# EAGLE board Sequencer-Memory-V1.0-3 2 (EAGLE 7.6.0)

Size 113.97 x 152.38 mm. Coordinates in mm from the lower left corner, seen from the top.
Outline: 113.97,0 113.97,152.38 0,152.38 0,0 113.97,0
Copper layers (1*16): Top 0.0356mm / dielectric 1.5011mm / Bottom 0.0356mm
Design rules "LaenPCBOrder *": minimum track width 6mil, minimum drill 13mil, track to track 6mil, track to pad 6mil, pad to pad 6mil, via to via 6mil, smd to smd 6mil, copper to edge 15mil, drill to drill 6mil, minimum pad ring 7mil, minimum via ring 7mil, stop-mask expansion 3mil, vias tented up to drill 0mil, thermal gap 10mil
Holes 3.2 mm at 111.43,2.54 111.43,149.86 2.21,149.86 2.21,2.54

## Footprints (pad centres in the part's own frame; a part is rotated, then mirrored left to right if it is on the bottom)
C025-024X044 = drill 0.813 pad 1.422 octagon: 1 -1.27,0; 2 1.27,0
SW4-6.2X6.2X5.0MM = drill 1.143 pad 1.905 square: 1 -3.25,2.25 | drill 1.143 pad 1.905: 2 -3.25,-2.25; 3 3.25,-2.25; 4 3.25,2.25
JP1 = drill 0.914 long: 1 0,-1.27; 2 0,1.27
LED5MM = drill 0.813 octagon: A -1.27,0; K 1.27,0
DIL28-6 = drill 0.813 long: 1 -16.51,-7.62; 2 -13.97,-7.62; 3 -11.43,-7.62; 4 -8.89,-7.62; 5 -6.35,-7.62; 6 -3.81,-7.62; 7 -1.27,-7.62; 8 1.27,-7.62; 9 3.81,-7.62; 10 6.35,-7.62; 11 8.89,-7.62; 12 11.43,-7.62; 13 13.97,-7.62; 14 16.51,-7.62; 15 16.51,7.62; 16 13.97,7.62; 17 11.43,7.62; 18 8.89,7.62; 19 6.35,7.62; 20 3.81,7.62; 21 1.27,7.62; 22 -1.27,7.62; 23 -3.81,7.62; 24 -6.35,7.62; 25 -8.89,7.62; 26 -11.43,7.62; 27 -13.97,7.62; 28 -16.51,7.62
DIL28-3 = drill 0.813 long: 1 -16.51,-3.81; 2 -13.97,-3.81; 3 -11.43,-3.81; 4 -8.89,-3.81; 5 -6.35,-3.81; 6 -3.81,-3.81; 7 -1.27,-3.81; 8 1.27,-3.81; 9 3.81,-3.81; 10 6.35,-3.81; 11 8.89,-3.81; 12 11.43,-3.81; 13 13.97,-3.81; 14 16.51,-3.81; 15 16.51,3.81; 16 13.97,3.81; 17 11.43,3.81; 18 8.89,3.81; 19 6.35,3.81; 20 3.81,3.81; 21 1.27,3.81; 22 -1.27,3.81; 23 -3.81,3.81; 24 -6.35,3.81; 25 -8.89,3.81; 26 -11.43,3.81; 27 -13.97,3.81; 28 -16.51,3.81
DIL8 = drill 0.813 long: 1 -3.81,-3.81; 2 -1.27,-3.81; 3 1.27,-3.81; 4 3.81,-3.81; 5 3.81,3.81; 6 1.27,3.81; 7 -1.27,3.81; 8 -3.81,3.81
FTDI_DEVICE_SIDE = drill 1 square: P$1 -6.35,0 | drill 1.016 pad 1.778: P$2 -3.81,0; P$3 -1.27,0; P$4 1.27,0; P$5 3.81,0; P$6 6.35,0
1X03 = drill 1.016 long: 1 -2.54,0; 2 0,0; 3 2.54,0
TACTILE-PTH-SIDEEZ = drill 0.8 pad 1.7: 1 -2.5,0; 2 2.5,0 | drill 1.2 pad 2.2: ANCHOR1 -3.5,2.5; ANCHOR2 3.5,2.5
HC49/S = drill 0.813: 1 -2.413,0; 2 2.413,0
0207/10 = drill 0.813 octagon: 1 -5.08,0; 2 5.08,0
9070-1W = drill 0.813 long: 1 5.08,-2.54; 2 5.08,0; 3 5.08,2.54 | drill 1.118 pad 1.778: B 0,-2.54; B1 0,2.54
MA20-2 = drill 1.016 octagon: 1 -24.13,-1.27; 2 -24.13,1.27; 3 -21.59,-1.27; 4 -21.59,1.27; 5 -19.05,-1.27; 6 -19.05,1.27; 7 -16.51,-1.27; 8 -16.51,1.27; 9 -13.97,-1.27; 10 -13.97,1.27; 11 -11.43,-1.27; 12 -11.43,1.27; 13 -8.89,-1.27; 14 -8.89,1.27; 15 -6.35,-1.27; 16 -6.35,1.27; 17 -3.81,-1.27; 18 -3.81,1.27; 19 -1.27,-1.27; 20 -1.27,1.27; 21 1.27,-1.27; 22 1.27,1.27; 23 3.81,-1.27; 24 3.81,1.27; 25 6.35,-1.27; 26 6.35,1.27; 27 8.89,-1.27; 28 8.89,1.27; 29 11.43,-1.27; 30 11.43,1.27; 31 13.97,-1.27; 32 13.97,1.27; 33 16.51,-1.27; 34 16.51,1.27; 35 19.05,-1.27; 36 19.05,1.27; 37 21.59,-1.27; 38 21.59,1.27; 39 24.13,-1.27; 40 24.13,1.27

## Placement (x,y rotation side)
C11  20pf  [C025-024X044]  47.93,127 270 top
C12  20pf  [C025-024X044]  47.93,119.38 90 top
C13  0.1  [C025-024X044]  74.6,133.35 180 top
C14  0.1  [C025-024X044]  18.72,113.03 0 top
C15  0.1  [C025-024X044]  18.72,105.41 0 top
C16  0.1  [C025-024X044]  94.92,1.27 180 top
C17  0.1  [C025-024X044]  94.92,39.37 180 top
C18  0.1  [C025-024X044]  44.12,39.37 180 top
C19  0.1  [C025-024X044]  69.52,39.37 180 top
C20  0.1  [C025-024X044]  44.12,1.27 180 top
C21  0.1  [C025-024X044]  18.72,1.27 180 top
C22  0.1  [C025-024X044]  69.52,1.27 180 top
C23  0.1  [C025-024X044]  18.72,39.37 180 top
CPU-RESET  TS-1109-7  [SW4-6.2X6.2X5.0MM]  39.04,96.52 0 top
DTR-RESET  [JP1]  74.6,140.97 270 top
FTDI-VCC  [JP1]  84.76,140.97 270 top
HEART  [LED5MM]  61.9,148.59 270 top
IC1  [DIL28-6]  94.92,58.42 90 top
IC1-5  MCP23017SP  [DIL28-3]  107.62,110.49 90 top
IC2  [DIL28-6]  94.92,20.32 90 top
IC3  [DIL28-6]  69.52,58.42 90 top
IC4  [DIL28-6]  69.52,20.32 90 top
IC5  [DIL28-6]  18.72,58.42 90 top
IC6  [DIL28-6]  44.12,58.42 90 top
IC7  [DIL28-6]  44.12,20.32 90 top
IC8  [DIL28-6]  18.72,20.32 90 top
IC9  24AA01P  [DIL8]  16.18,96.52 0 top
IC10  ATMEGA328P_PDIP  [DIL28-3]  19.99,123.19 0 top
IC11  MCP23017SP  [DIL28-3]  82.22,110.49 90 top
IC12  MCP23017SP  [DIL28-3]  94.92,110.49 90 top
IC13  MCP23017SP  [DIL28-3]  69.52,110.49 90 top
IC14  MCP23017SP  [DIL28-3]  56.82,110.49 90 top
JP3  FTDI_DEVICE  [FTDI_DEVICE_SIDE]  80.95,147.32 0 top
JP4  [1X03]  7.29,96.52 90 top
LOAD-UC  SWITCH-MOMENTARY-2SIDE_EZ  [TACTILE-PTH-SIDEEZ]  23.8,149.86 180 top
LOADING  [LED5MM]  41.58,148.59 270 top
PWR1  [LED5MM]  105.08,148.59 270 top
Q1  16Mhz  [HC49/S]  41.58,123.19 90 top
R1  330  [0207/10]  105.08,137.16 270 top
R3  10k  [0207/10]  7.29,19.05 90 top
R5  2.2k  [0207/10]  8.56,109.22 0 top
R6  330  [0207/10]  61.9,137.16 270 top
R8  10k  [0207/10]  8.56,113.03 0 top
R11  330  [0207/10]  51.74,137.16 270 top
R12  2.2k  [0207/10]  8.56,105.41 0 top
R16  330  [0207/10]  41.58,137.16 270 top
R25  10k  [0207/10]  39.04,105.41 0 top
READY  [LED5MM]  51.74,148.59 270 top
S-A  [9070-1W]  11.1,146.05 270 top
SV1  [MA20-2]  27.61,82.55 0 top
SV2  [MA20-2]  86.03,82.55 180 top

## Library data of the parts
C11-C23 = adafruit
CPU-RESET = Seeed-OPL-Switch; MPN: TS-1109-7
DTR-RESET FTDI-VCC = jumper
HEART LOADING PWR1 READY = led
IC1-IC8 = memory-hitachi; OC_FARNELL: 283605; OC_NEWARK: unknown
IC1-5 IC11-IC14 = microchip; MF: MICROCHIP; MPN: MCP23017-E/SP; OC_FARNELL: 1332088; OC_NEWARK: 31K2959
IC9 = microchip; MPN: 24AA01-I/P; OC_FARNELL: 1331266; OC_NEWARK: 35M0692
IC10 = SparkFun-DigitalIC
JP3 = SparkFun-Connectors
JP4 = pinhead
LOAD-UC = SparkFun-Electromechanical
Q1 = crystal; OC_FARNELL: 1667008; OC_NEWARK: unknown
R1 = eagle-ltspice; SPICEMODEL: NONE; SPICEPREFIX: R
R3 R5 R6 R8 R11 R12 R16 R25 = resistor
S-A = switch
SV1 SV2 = con-lstb; OC_FARNELL: unknown; OC_NEWARK: unknown

## Nets
-CMEMRD: IC1.22 IC2.22 IC3.22 IC4.22 IC5.22 IC6.22 IC7.22 IC8.22 IC10.15
-CMEMSEL: IC1.20 IC2.20 IC3.20 IC4.20 IC5.20 IC6.20 IC7.20 IC8.20 IC10.16
-CMEMWR: IC1.27 IC2.27 IC3.27 IC4.27 IC5.27 IC6.27 IC7.27 IC8.27 IC10.14
-RESET: C13.2 CPU-RESET.3 IC1-5.18 IC10.1 IC11.18 IC12.18 IC13.18 IC14.18 R8.2
AC-LD: IC3.17 IC12.3 SV2.15
AC-LD-INV: IC3.18 IC12.2 SV2.13
AC-RD: IC3.16 IC12.4 SV2.17
ADDR-REG-ID0: IC5.12 IC14.22 SV1.5
ADDR-REG-ID1: IC5.13 IC14.23 SV1.7
ADDR-REG-LD: IC5.15 IC14.24 SV1.9
ADDR-REG-RD: IC5.16 IC14.25 SV1.11
ALU0: IC4.13 IC12.26 SV2.5
ALU1: IC4.12 IC12.27 SV2.7
ALU2: IC4.11 IC12.28 SV2.9
ALU3: IC3.19 IC12.1 SV2.11
ALU-FUNC: IC4.15 IC12.25 SV2.3
ARD-RXIN: IC10.2 JP3.P$3
ARD-TXOUT: IC10.3 JP3.P$2
BR-COND: IC3.13 IC12.6 SV2.4
CADDR0: IC1-5.21 IC1.10 IC2.10 IC3.10 IC4.10 IC5.10 IC6.10 IC7.10 IC8.10
CADDR1: IC1-5.22 IC1.9 IC2.9 IC3.9 IC4.9 IC5.9 IC6.9 IC7.9 IC8.9
CADDR2: IC1-5.23 IC1.8 IC2.8 IC3.8 IC4.8 IC5.8 IC6.8 IC7.8 IC8.8
CADDR3: IC1-5.24 IC1.7 IC2.7 IC3.7 IC4.7 IC5.7 IC6.7 IC7.7 IC8.7
CADDR4: IC1-5.25 IC1.6 IC2.6 IC3.6 IC4.6 IC5.6 IC6.6 IC7.6 IC8.6
CADDR5: IC1-5.26 IC1.5 IC2.5 IC3.5 IC4.5 IC5.5 IC6.5 IC7.5 IC8.5
CADDR6: IC1-5.27 IC1.4 IC2.4 IC3.4 IC4.4 IC5.4 IC6.4 IC7.4 IC8.4
CADDR7: IC1-5.28 IC1.3 IC2.3 IC3.3 IC4.3 IC5.3 IC6.3 IC7.3 IC8.3
CADDR8: IC1-5.1 IC1.25 IC2.25 IC3.25 IC4.25 IC5.25 IC6.25 IC7.25 IC8.25
CADDR9: IC1-5.2 IC1.24 IC2.24 IC3.24 IC4.24 IC5.24 IC6.24 IC7.24 IC8.24
CADDR10: IC1-5.3 IC1.21 IC2.21 IC3.21 IC4.21 IC5.21 IC6.21 IC7.21 IC8.21
CADDR11: IC1-5.4 IC1.23 IC2.23 IC3.23 IC4.23 IC5.23 IC6.23 IC7.23 IC8.23
CADDR12: IC1-5.5 IC1.2 IC2.2 IC3.2 IC4.2 IC5.2 IC6.2 IC7.2 IC8.2
CMEMSEL: IC1.26 IC2.26 IC3.26 IC4.26 IC5.26 IC6.26 IC7.26 IC8.26 R3.1
GND: C11.1 C12.1 C14.1 C15.1 C16.1 C17.1 C18.1 C19.1 C20.1 C21.1 C22.1 C23.1 CPU-RESET.1 IC1-5.10 IC1-5.15 IC1-5.16 IC1-5.17 IC1.14 IC2.14 IC3.14 IC4.14 IC5.14 IC6.14 IC7.14 IC8.14 IC9.4 IC10.8 IC10.22 IC11.10 IC11.15 IC11.16 IC12.10 IC12.17 IC13.10 IC13.15 IC13.17 IC14.10 IC14.16 IC14.17 JP3.P$5 JP3.P$6 JP4.1 LOAD-UC.2 PWR1.K R6.2 R11.2 R16.2 S-A.3 SV1.39 SV1.40 SV2.39 SV2.40
H/L-SWAP: IC3.12 IC12.7 SV2.6
HEART: HEART.A IC10.17
I/D-REG-DN: IC6.13 IC13.3 SV1.8
I/D-REG-LD: IC6.11 IC13.1 SV1.4
I/D-REG-RD: IC6.12 IC13.2 SV1.6
I/D-REG-UP: IC6.15 IC13.4 SV1.10
I/O-ADDR: IC7.17 IC13.26 SV2.31
I/O-RD: IC7.16 IC13.25 SV2.29
I/O-WR: IC7.15 IC13.24 SV2.27
IN: IC3.11 IC12.8 SV2.8
INT: IC7.18 IC13.27 SV2.33
INTA: IC7.19 IC13.28 SV2.35
LD: IC10.19 LOADING.A
MEM-RD: IC7.13 IC13.23 SV2.25
MEM-WR: IC7.12 IC13.22 SV2.23
N$1: PWR1.A R1.1
N$6: C11.2 IC10.9 Q1.2
N$7: C12.2 IC10.10 Q1.1
N$8: C13.1 DTR-RESET.2
N$17: C14.2 IC10.21
N$25: R11.1 READY.K
N$26: LOADING.K R16.1
N$27: HEART.K R6.1
N$30: IC10.23 S-A.2
N$32: IC9.7 JP4.2
N$33: DTR-RESET.1 JP3.P$1
N$34: FTDI-VCC.2 JP3.P$4
N$39: IC10.25 LOAD-UC.1 R25.1
OUT: IC2.19 IC11.21 SV2.10
READY: IC10.18 READY.A SV1.38
READY1: IC10.24 SV1.36
REG-BRD-LD-ID0: IC8.12 IC14.2 SV1.21
REG-BRD-LD-ID1: IC8.13 IC14.3 SV1.23
REG-BRD-RD-ID0: IC5.17 IC14.26 SV1.13
REG-BRD-RD-ID1: IC5.18 IC14.27 SV1.15
REG-FUNC: IC5.11 IC14.21 SV1.3
REG-LD-HI: IC7.11 IC13.21 SV1.35
REG-LD-ID0: IC8.15 IC14.4 SV1.25
REG-LD-ID1: IC8.16 IC14.5 SV1.27
REG-LD-LO: IC8.18 IC14.7 SV1.31
REG-RD-HI: IC8.19 IC14.8 SV1.33
REG-RD-ID0: IC5.19 IC14.28 SV1.17
REG-RD-ID1: IC8.11 IC14.1 SV1.19
REG-RD-LO: IC8.17 IC14.6 SV1.29
RESET: IC2.18 IC11.22 SV2.12
SCL: IC1-5.12 IC9.6 IC10.28 IC11.12 IC12.12 IC13.12 IC14.12 R5.1
SDA: IC1-5.13 IC9.5 IC10.27 IC11.13 IC12.13 IC13.13 IC14.13 R12.1
SP/PC-ADDR-RD: IC6.19 IC13.8 SV1.18
SP/PC-DATA-RD-HI: IC6.18 IC13.7 SV1.16
SP/PC-DATA-RD-LO: IC6.17 IC13.6 SV1.14
SP/PC-DN: IC4.17 IC12.23 SV1.24
SP/PC-LD-HI: IC4.18 IC12.22 SV1.22
SP/PC-LD-LO: IC4.19 IC12.21 SV1.20
SP/PC-SEL: IC6.16 IC13.5 SV1.12
SP/PC-UP: IC4.16 IC12.24 SV1.26
SR-LD: IC3.15 IC12.5 SV2.19
UNUSED0: IC2.17 IC11.23 SV2.14
UNUSED1: IC2.16 IC11.24 SV2.16
UNUSED2: IC2.15 IC11.25 SV2.18
UNUSED3: IC2.13 IC11.26 SV2.20
UNUSED4: IC2.12 IC11.27 SV2.22
UNUSED5: IC2.11 IC11.28 SV2.24
UNUSED6: IC1.19 IC11.1 SV2.26
UNUSED7: IC1.18 IC11.2 SV2.28
UNUSED8: IC1.17 IC11.3 SV2.30
UNUSED9: IC1.16 IC11.4 SV2.32
UNUSED10: IC1.15 IC11.5 SV2.34
UNUSED11: IC1.13 IC11.6 SV2.36
UNUSED12: IC1.12 IC11.7 SV2.38
UNUSED13: IC1.11 IC11.8 SV2.37
VCC: C15.2 C16.2 C17.2 C18.2 C19.2 C20.2 C21.2 C22.2 C23.2 FTDI-VCC.1 IC1-5.9 IC1.28 IC2.28 IC3.28 IC4.28 IC5.28 IC6.28 IC7.28 IC8.28 IC9.1 IC9.2 IC9.3 IC9.8 IC10.7 IC10.20 IC11.9 IC11.17 IC12.9 IC12.15 IC12.16 IC13.9 IC13.16 IC14.9 IC14.15 JP4.3 R1.2 R3.2 R5.2 R8.1 R12.2 R25.2 S-A.1 SV1.1 SV1.2 SV2.1 SV2.2

## Tracks (layer width: path | path; a pad name or v marks a point on that pad's centre or on a via)
-CMEMRD  (8 unrouted)
-CMEMSEL  (8 unrouted)
-CMEMWR  (8 unrouted)
-RESET  (8 unrouted)
AC-LD  (2 unrouted)
AC-LD-INV  (2 unrouted)
AC-RD  (2 unrouted)
ADDR-REG-ID0  (2 unrouted)
ADDR-REG-ID1  (2 unrouted)
ADDR-REG-LD  (2 unrouted)
ADDR-REG-RD  (2 unrouted)
ALU0  (2 unrouted)
ALU1  (2 unrouted)
ALU2  (2 unrouted)
ALU3  (2 unrouted)
ALU-FUNC  (2 unrouted)
ARD-RXIN  (1 unrouted)
ARD-TXOUT  (1 unrouted)
BR-COND  (2 unrouted)
CADDR0  (8 unrouted)
CADDR1  (8 unrouted)
CADDR2  (8 unrouted)
CADDR3  (8 unrouted)
CADDR4  (8 unrouted)
CADDR5  (8 unrouted)
CADDR6  (8 unrouted)
CADDR7  (8 unrouted)
CADDR8  (8 unrouted)
CADDR9  (8 unrouted)
CADDR10  (8 unrouted)
CADDR11  (8 unrouted)
CADDR12  (8 unrouted)
CMEMSEL  (8 unrouted)
GND  (51 unrouted)
H/L-SWAP  (2 unrouted)
HEART  (1 unrouted)
I/D-REG-DN  (2 unrouted)
I/D-REG-LD  (2 unrouted)
I/D-REG-RD  (2 unrouted)
I/D-REG-UP  (2 unrouted)
I/O-ADDR  (2 unrouted)
I/O-RD  (2 unrouted)
I/O-WR  (2 unrouted)
IN  (2 unrouted)
INT  (2 unrouted)
INTA  (2 unrouted)
LD  (1 unrouted)
MEM-RD  (2 unrouted)
MEM-WR  (2 unrouted)
N$1  (1 unrouted)
N$6  (2 unrouted)
N$7  (2 unrouted)
N$8  (1 unrouted)
N$17  (1 unrouted)
N$25  (1 unrouted)
N$26  (1 unrouted)
N$27  (1 unrouted)
N$30  (1 unrouted)
N$32  (1 unrouted)
N$33  (1 unrouted)
N$34  (1 unrouted)
N$39  (2 unrouted)
OUT  (2 unrouted)
READY  (2 unrouted)
READY1  (1 unrouted)
REG-BRD-LD-ID0  (2 unrouted)
REG-BRD-LD-ID1  (2 unrouted)
REG-BRD-RD-ID0  (2 unrouted)
REG-BRD-RD-ID1  (2 unrouted)
REG-FUNC  (2 unrouted)
REG-LD-HI  (2 unrouted)
REG-LD-ID0  (2 unrouted)
REG-LD-ID1  (2 unrouted)
REG-LD-LO  (2 unrouted)
REG-RD-HI  (2 unrouted)
REG-RD-ID0  (2 unrouted)
REG-RD-ID1  (2 unrouted)
REG-RD-LO  (2 unrouted)
RESET  (2 unrouted)
SCL  (7 unrouted)
SDA  (7 unrouted)
SP/PC-ADDR-RD  (2 unrouted)
SP/PC-DATA-RD-HI  (2 unrouted)
SP/PC-DATA-RD-LO  (2 unrouted)
SP/PC-DN  (2 unrouted)
SP/PC-LD-HI  (2 unrouted)
SP/PC-LD-LO  (2 unrouted)
SP/PC-SEL  (2 unrouted)
SP/PC-UP  (2 unrouted)
SR-LD  (2 unrouted)
UNUSED0  (2 unrouted)
UNUSED1  (2 unrouted)
UNUSED2  (2 unrouted)
UNUSED3  (2 unrouted)
UNUSED4  (2 unrouted)
UNUSED5  (2 unrouted)
UNUSED6  (2 unrouted)
UNUSED7  (2 unrouted)
UNUSED8  (2 unrouted)
UNUSED9  (2 unrouted)
UNUSED10  (2 unrouted)
UNUSED11  (2 unrouted)
UNUSED12  (2 unrouted)
UNUSED13  (2 unrouted)
VCC  (45 unrouted)

## Text on the board
tNames: WP | YACC1 SEQUENCER MEMORY BOARD V1.0 | www.onepagecomputer.com